# Altium PCB RHS_FEST22-EV_Rev1.PcbDoc
Units mm, origin at the board's own origin, x right, y up, seen from the top; angles counter-clockwise.
Board outline 18 x 75 mm, 4 copper layers (Top Layer, GND, 3.3V/2.8V, Bottom Layer), stack 1.616 mm thick; 48 components, 30 nets, 202 pads, 123 vias.
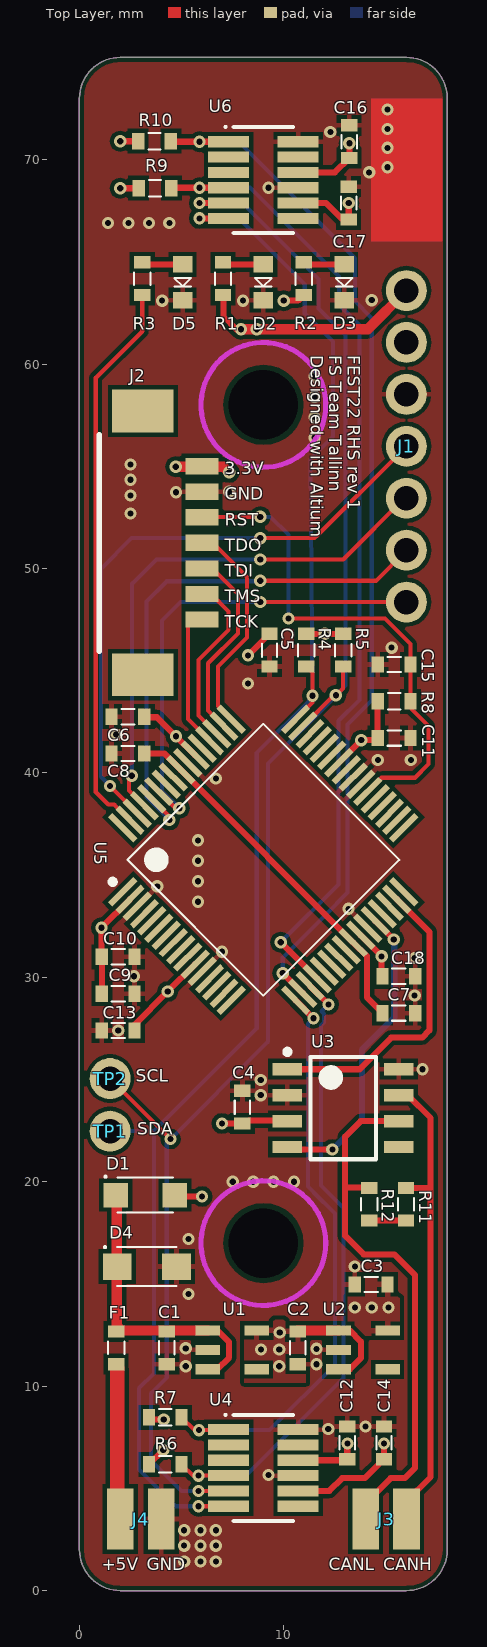
[diagram p0: Top Layer view]
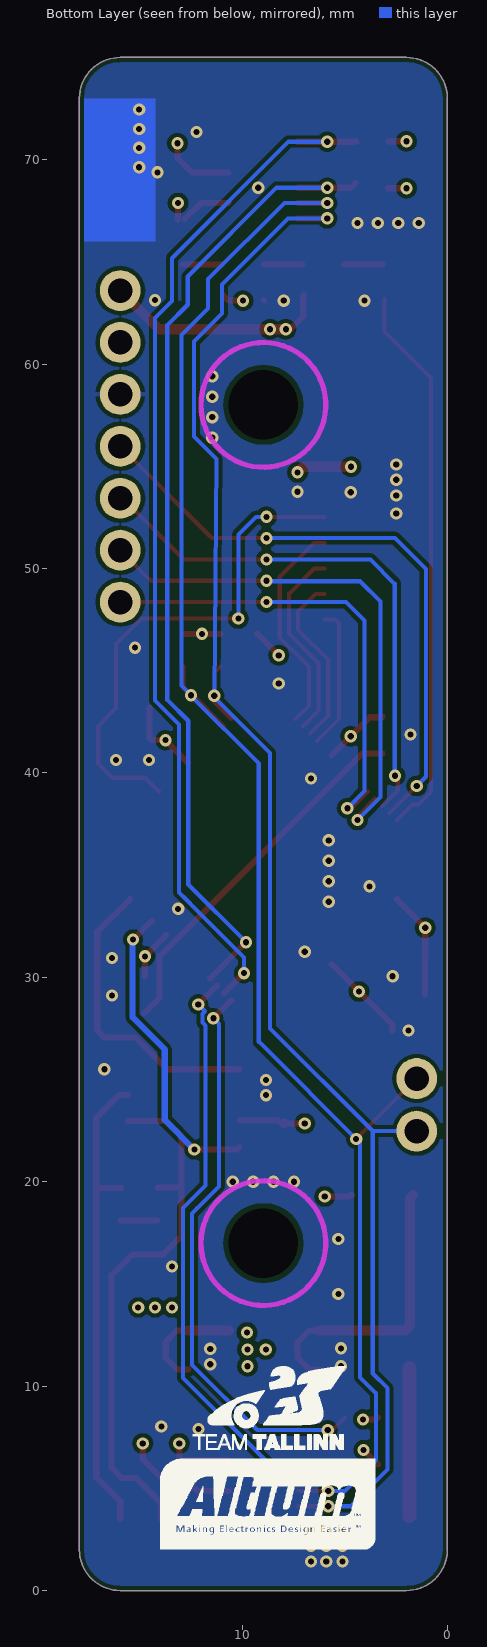
[diagram p1: Bottom Layer view, seen from below]
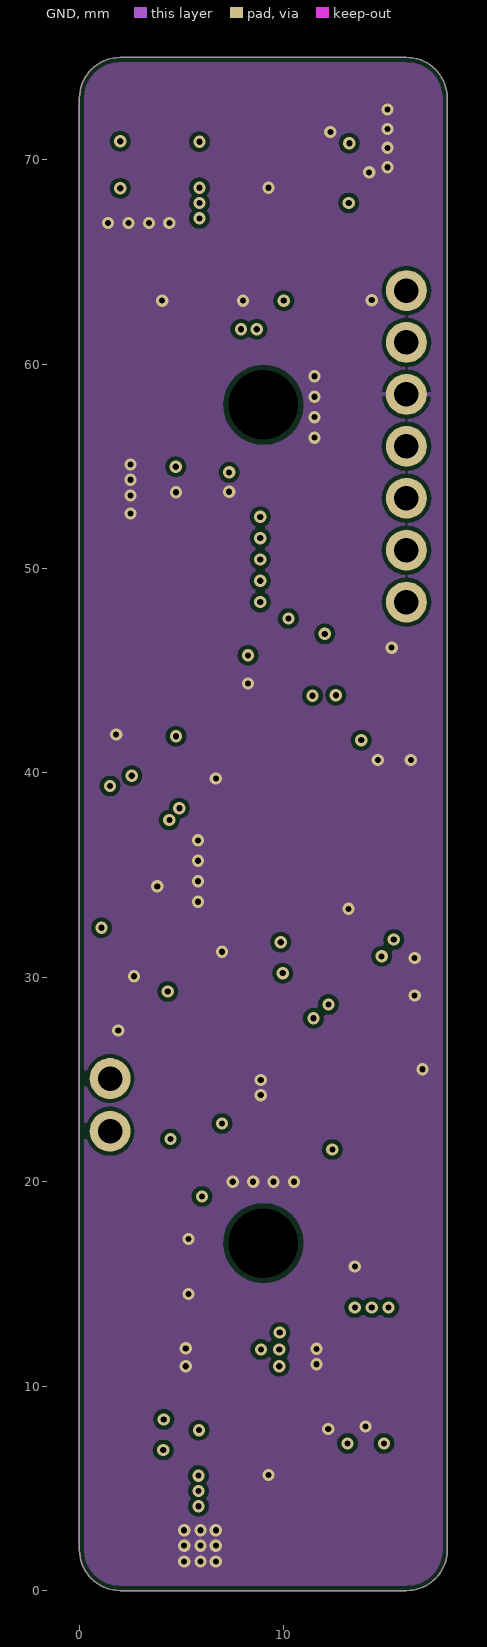
[diagram p2: GND]
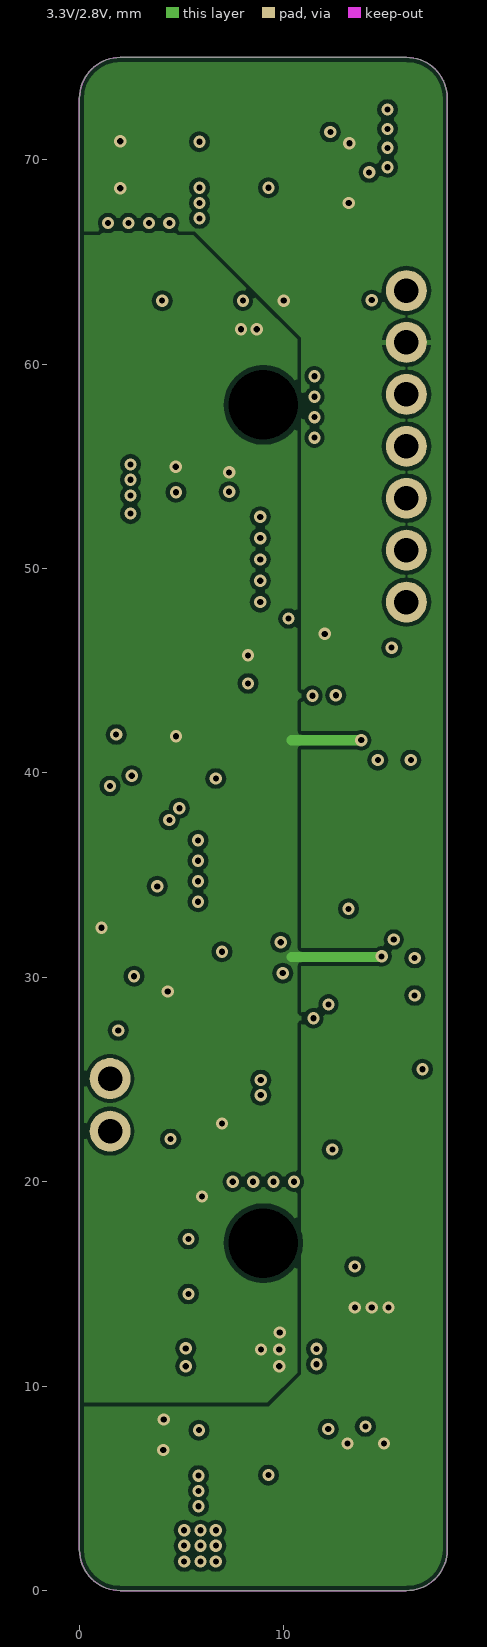
[diagram p3: 3.3V/2.8V]
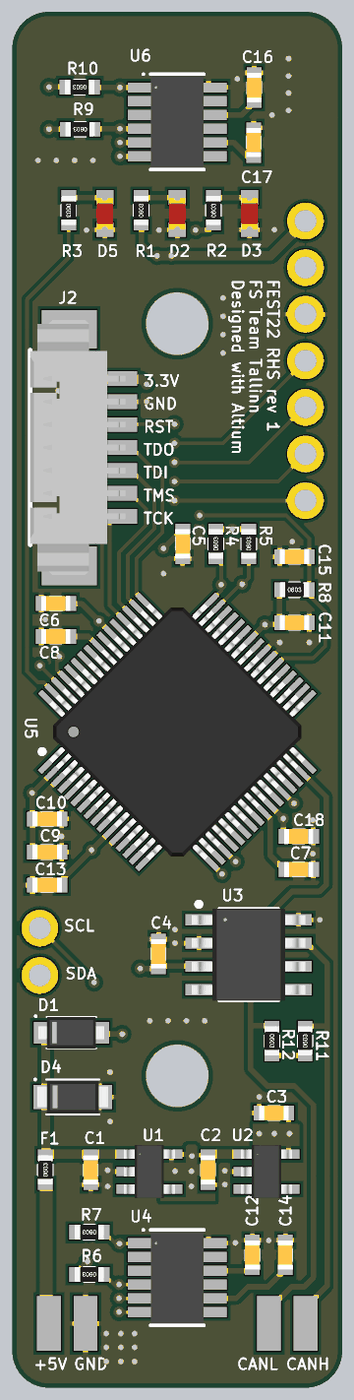
[diagram p4: 3D render of the assembled board from above, using the file's embedded part models]

## Layer stack, top to bottom
Top Solder: solder mask 0.02, Solder Resist, Dk 3.5
Top Layer: signal copper 0.053
Dielectric 1: core 0.18, FR-4, Dk 4.2
GND: signal copper 0.035
Dielectric 3: prepreg 1.08, Dk 4.2
3.3V/2.8V: signal copper 0.035
Dielectric 2: core 0.18, Dk 4.2
Bottom Layer: signal copper 0.053
Bottom Solder: solder mask 0.02, Solder Resist, Dk 3.5

## Board outline
0,2 0,73 cw(c2,73) 2,75 16,75 cw(c16,73) 18,73 18,2 cw(c16,2) 16,0 2,0 cw(c2,2)

## Design rules (kind name [scope] priority, off if disabled: settings)
BoardOutlineClearance [All] p1: gap=0.2 ignorepadtopadclearanceinfootprint=FALSE
Clearance [All] p1: gap=0.2 ignorepadtopadclearanceinfootprint=FALSE except(0.102: Arc-Arc Arc-Track Arc-SMDPad Arc-THPad Arc-Text Track-Track Track-SMDPad Track-THPad Track-Text SMDPad-SMDPad SMDPad-THPad SMDPad-Text THPad-THPad THPad-Text Fill-Text Poly-Text Region-Text Text-Text; 0.127: Arc-Via Track-Via SMDPad-Via THPad-Via Via-Via Via-Text; 0.25: Arc-Hole Track-Hole SMDPad-Hole THPad-Hole Via-Hole Fill-Hole Poly-Hole Region-Hole Text-Hole)
ComponentClearance [All] p1: gap=0.102 collisioncheckmode=3 verticalgap=0.102 showdistances=TRUE
DiffPairsRouting [All] p1: maxlimit=0.102 minlimit=0.102 mostfreqgap=0.102 toplayer_minwidth=0.102 toplayer_maxwidth=1816.048 toplayer_prefwidth=0.102 midlayer1_minwidth=0.102 midlayer1_maxwidth=1816.048 midlayer1_prefwidth=0.102 midlayer2_minwidth=0.102 midlayer2_maxwidth=1816.048 midlayer2_prefwidth=0.102 bottomlayer_minwidth=0.102 bottomlayer_maxwidth=1816.048 bottomlayer_prefwidth=0.102 maxuncoupledlength=12.7
Height [All] p1: minheight=0 maxheight=1816.048 prefheight=12.7
HoleSize [All] p1: absolutevalues=TRUE maxlimit=6.3 minlimit=0.2 maxpercent=80.000 minpercent=20.000
HoleToHoleClearance [All] p1: gap=0.25 allowstackedmicrovias=FALSE
MinimumAnnularRing [All] p1: minimumring=0.076
MinimumSolderMaskSliver [All] p1: minsoldermaskwidth=0
PlaneClearance [All] p1: clearance=0.102
PlaneConnect PlaneConnectPowerPads [InPadClass('PowerPads')] p1: planeconnectstyle=Direct reliefexpansion=0.508 reliefentries=4 reliefconductorwidth=0.254 reliefairgap=0.254
PlaneConnect [All] p2: pad.planeconnectstyle=Relief pad.reliefexpansion=0.3 pad.reliefentries=4 pad.reliefconductorwidth=0.102 pad.reliefairgap=0.102 via.planeconnectstyle=Direct via.reliefexpansion=0.3 via.reliefentries=4 via.reliefconductorwidth=0.127 via.reliefairgap=0.127
PolygonConnect PolygonConnectPowerPads [All vs (InPadClass('PowerPads'))] p1: thpad.connectstyle=Relief thpad.reliefconductorwidth=0.508 thpad.reliefentries=4 thpad.polygonreliefangle="90 Angle" thpad.airgapwidth=0.254 smdpad.connectstyle=Relief smdpad.reliefconductorwidth=0.508 smdpad.reliefentries=4 smdpad.polygonreliefangle="90 Angle" smdpad.airgapwidth=0.254 via.connectstyle=Direct via.reliefconductorwidth=0.254 via.reliefentries=4 via.polygonreliefangle="90 Angle" via.airgapwidth=0.254
PolygonConnect [All] p2: thpad.connectstyle=Relief thpad.reliefconductorwidth=0.254 thpad.reliefentries=4 thpad.polygonreliefangle="90 Angle" thpad.airgapwidth=0.2 smdpad.connectstyle=Relief smdpad.reliefconductorwidth=0.254 smdpad.reliefentries=4 smdpad.polygonreliefangle="90 Angle" smdpad.airgapwidth=0.2 via.connectstyle=Direct via.reliefconductorwidth=0.127 via.reliefentries=4 via.polygonreliefangle="90 Angle" via.airgapwidth=0.127
RoutingVias [All] p1: holewidth=0.3 width=0.6 viastyle="Through Hole" minholewidth=0.2 minwidth=0.45 maxholewidth=6.3 maxwidth=6.55
SilkToSilkClearance [All] p1: silktosilkclearance=0
SilkToSolderMaskClearance [IsPad] p1: minsilkscreentomaskgap=0.102 clearancetoexposedcopper=TRUE
SolderMaskExpansion [All] p1: expansion=0.075
Width [All] p1: maxlimit=1816.048 minlimit=0.102 preferedwidth=0.102
20 further rules are at their usual default settings.

## Classes and differential pairs
component class RHS_FEST22-EV_Power: C1 C2 C3 D1 D2 D3 D4 F1 R1 R2 U1 U2
component class RHS_FEST22-EV_Logic: C4 C5 C6 C7 C8 C9 C10 C11 C12 C13 C14 C15 C16 C17 C18 D5 J1 J2 J3 J4 R3 R4 R5 R6 R7 R8 R9 R10 R11 R12 TP1 TP2 U3 U4 U5 U6

## Components (designator, comment, footprint, x,y, rotation, side; value= is the part's Value field where it differs from the comment)
C1 "1uF" "CAP [0603] 1608" 4.275,11.875 r270 top
C2 "1uF" "CAP [0603] 1608" 10.675,11.875 r270 top
C3 "1uF" "CAP [0603] 1608" 14.275,14.975 r180 top
C4 "0.1uF" "CAP [0603] 1608" 7.975,23.65 r270 top
C5 "10uF" "CAP [0603] 1608" 9.3,46 r270 top
C6 "0.1uF" "CAP [0603] 1608" 2.375,42.75 r0 top
C7 "0.1uF" "CAP [0603] 1608" 15.63,28.25 r180 top
C8 "3.3uF" "CAP [0603] 1608" 2.375,40.95 r180 top
C9 "1uF" "CAP [0603] 1608" 1.9,29.2 r0 top
C10 "0.1uF" "CAP [0603] 1608" 1.9,31 r0 top
C11 "0.1uF" "CAP [0603] 1608" 15.4,41.704 r0 top
C12 "0.1uF" "CAP [0603] 1608" 13.1,7.232 r270 top
C13 "0.1uF" "CAP [0603] 1608" 1.9,27.4 r180 top
C14 "4.7uF" "CAP [0603] 1608" 14.9,7.232 r270 top
C15 "0.1uF" "CAP [0603] 1608" 15.4,45.3 r180 top
C16 "0.1uF" "CAP [0603] 1608" 13.2,70.875 r270 top
C17 "4.7uF" "CAP [0603] 1608" 13.175,67.875 r270 top
C18 "0.1uF" "CAP [0603] 1608" 15.63,30.05 r0 top
D1 "BAT46WH,115" SOD-123F 3.225,19.35 r0 top
D2 "Red LED" "LED [0603] 1608" 9,64 r90 top
D3 "Red LED" "LED [0603] 1608" 12.95,64 r90 top
D4 "TV02W5V0-G" SOD-123-2 3.3,15.85 r0 top
D5 "Red LED" "LED [0603] 1608" 5.05,64 r90 top
F1 "" "RES [0603] 1608" 1.8,11.875 r90 top
J1 "Wire connections_1" "Free pins" 16,63.595 r270 top
J2 "53261-0771" "Molex 53261-0771" 6,55 r270 top
J3 "Wire connections" "Wire pads" 14,3.5 r0 top
J4 "Wire connections" "Wire pads" 2,3.5 r0 top
R1 "750" "RES [0603] 1608" 7.025,64.175 r90 top
R2 "510" "RES [0603] 1608" 10.975,64.175 r90 top
R3 "750" "RES [0603] 1608" 3.075,64.175 r270 top
R4 "2.2k" "RES [0603] 1608" 11.1,46 r90 top
R5 "2.2k" "RES [0603] 1608" 12.9,46 r90 top
R6 "47k" "RES [0603] 1608" 4.2,6.175 r180 top
R7 "47k" "RES [0603] 1608" 4.2,8.475 r180 top
R8 "10k" "RES [0603] 1608" 15.4,43.5 r0 top
R9 "47k" "RES [0603] 1608" 3.7,68.6 r180 top
R10 "47k" "RES [0603] 1608" 3.675,70.9 r180 top
R11 "NF" "RES [0603] 1608" 15.975,18.9 r90 top
R12 "NF" "RES [0603] 1608" 14.175,18.9 r270 top
TP1 "Test Point" "Testpoint round 0.4mm" 1.5,22.475 r90 top
TP2 "Test Point" "Testpoint round 0.4mm" 1.5,25.05 r180 top
U1 "NCV8603SN33T1G" TSOT-5 7.475,11.775 r0 top
U2 "ADP150AUJZ-2.8-R7" TSOT-5 13.875,11.775 r0 top
U3 "SN65HVD231QD" SOIC-8 12.9,23.6 r0 top
U4 "VL6180V1NR/1" VL6180 9,6 r0 top locked
U5 "TM4C123 64-pin" LQFP64 9,35.75 r45 top
U6 "VL6180V1NR/1" VL6180 9,69 r0 top

## Footprints (in the part's own frame and the unit in brackets; to place one, negate y for a bottom-side part, rotate by r counter-clockwise, add the part's x,y. Pads: shape width x height; smd on the part's side, far side on the other; paste and mask are expansions set on the pad)
"CAP [0603] 1608" [mm]
  rect 0.6x0.8 smd: 1(-0.8,0) 2(0.8,0)
  silkscreen extent -0.33,-0.38 0.33,0.38, body extent -0.93,-0.41 0.93,0.41, height 0.81
"Free pins" [mm]
  round 2 hole 1.2: 1(0,0) 2(2.54,0) 3(5.08,0) 4(7.62,0) 5(10.16,0) 6(12.7,0) 7(15.24,0)
"LED [0603] 1608" [mm] "Chip Diode, 2-Leads, Body 1.60x0.80mm, IPC Medium Density"
  rect 0.8x0.95 smd: 1(-0.875,0) 2(0.875,0)
  silkscreen extent -0.2,-0.4 0.2,0.4, body extent -0.85,-0.45 0.85,0.45, height 0.9
LQFP64 [mm]
  rect 1.75x0.3 smd: 1(-5.975,3.75) 2(-5.975,3.25) 3(-5.975,2.75) 4(-5.975,2.25) 5(-5.975,1.75) 6(-5.975,1.25) 7(-5.975,0.75) 8(-5.975,0.25) 9(-5.975,-0.25) 10(-5.975,-0.75) 11(-5.975,-1.25) 12(-5.975,-1.75) 13(-5.975,-2.25) 14(-5.975,-2.75) 15(-5.975,-3.25) 16(-5.975,-3.75) 33(5.975,-3.75) 34(5.975,-3.25) 35(5.975,-2.75) 36(5.975,-2.25) 37(5.975,-1.75) 38(5.975,-1.25) 39(5.975,-0.75) 40(5.975,-0.25) 41(5.975,0.25) 42(5.975,0.75) 43(5.975,1.25) 44(5.975,1.75) 45(5.975,2.25) 46(5.975,2.75) 47(5.975,3.25) 48(5.975,3.75)
  rect 0.3x1.75 smd: 17(-3.75,-5.975) 18(-3.25,-5.975) 19(-2.75,-5.975) 20(-2.25,-5.975) 21(-1.75,-5.975) 22(-1.25,-5.975) 23(-0.75,-5.975) 24(-0.25,-5.975) 25(0.25,-5.975) 26(0.75,-5.975) 27(1.25,-5.975) 28(1.75,-5.975) 29(2.25,-5.975) 30(2.75,-5.975) 31(3.25,-5.975) 32(3.75,-5.975) 49(3.75,5.975) 50(3.25,5.975) 51(2.75,5.975) 52(2.25,5.975) 53(1.75,5.975) 54(1.25,5.975) 55(0.75,5.975) 56(0.25,5.975) 57(-0.25,5.975) 58(-0.75,5.975) 59(-1.25,5.975) 60(-1.75,5.975) 61(-2.25,5.975) 62(-2.75,5.975) 63(-3.25,5.975) 64(-3.75,5.975)
  silkscreen extent -6.1,-4.7 4.7,4.7, body extent -6,-6 6,6, height 1.5
"Molex 53261-0771" [mm]
  rect 0.8x1.6 smd: 1(0,0) 2(1.25,0) 3(2.5,0) 4(3.75,0) 5(5,0) 6(6.25,0) 7(7.5,0)
  rect 2.1x3 smd: 8(10.2,-2.9) 9(-2.7,-2.9)
  silkscreen extent -1.55,-5.02 9.05,-5.02, body extent -3.2,-5.03 10.7,0.17, height 3.4
"RES [0603] 1608" [mm]
  rect 0.6x0.8 smd: 1(-0.8,0) 2(0.8,0)
  silkscreen extent -0.3,-0.4 0.3,0.4, body extent -0.8,-0.4 0.8,0.4, height 0.46
SOD-123-2 [mm]
  rect 1.4x1.3 smd: 1(-1.45,0) 2(1.45,0)
  silkscreen extent -2.1,-0.95 1.45,1, body extent -1.93,-0.95 1.93,0.95, height 1.35
SOD-123F [mm] "SODFL, 2-Leads, Body 1,60x3,50mm, IPC Medium Density"
  rect 1.2x1.2 smd: 1(-1.45,0) 2(1.45,0)
  silkscreen extent -2,-0.85 1.35,0.95, body extent -1.8,-0.85 1.8,0.85, height 1.2
SOIC-8 [mm] "SOIC, 8-Leads, Body 4,91x3,90mm, Pitch 1,27mm, IPC Medium Density"
  rect 1.45x0.6 smd: 1(-2.725,1.905) 2(-2.725,0.635) 3(-2.725,-0.635) 4(-2.725,-1.905) 5(2.725,-1.905) 6(2.725,-0.635) 7(2.725,0.635) 8(2.725,1.905)
  silkscreen extent -2.85,-2.5 1.6,2.88, body extent -3.1,-2.5 3.1,2.5, height 1.76
"Testpoint round 0.4mm" [mm]
  round 2 hole 1.2: 1(0,0)
TSOT-5 [mm] "SOT23, 5-Leads, Body 3,05x3,00mm, Pitch 0,95mm, IPC Medium Density"
  rect 1.2x0.5 smd: 1(-1.2,0.95) 2(-1.2,0) 3(-1.2,-0.95) 4(1.2,-0.95) 5(1.2,0.95)
  body extent -1.4,-1.45 1.4,1.45, height 0.99
VL6180 [mm] "PSON, 12-Leads, Body 4,80x2,80mm, Pitch 0,75mm, IPC Medium Density"
  rect 2x0.55 smd: 1(-1.7,1.875) 2(-1.7,1.125) 3(-1.7,0.375) 4(-1.7,-0.375) 5(-1.7,-1.125) 6(-1.7,-1.875) 7(1.7,-1.875) 8(1.7,-1.125) 9(1.7,-0.375) 10(1.7,0.375) 11(1.7,1.125) 12(1.7,1.875)
  silkscreen extent -1.9,-2.6 1.45,2.65, body extent -1.45,-2.45 1.45,2.45, height 1.09
"Wire pads" [mm]
  rect 1.3x3 smd: 1(0,0) 2(2,0)

## Part data
C1 C2 C3 C9: library part "Cap 1uF", Manufacturer=MURATA, Datasheet=https://www.farnell.com/datasheets/3158835.pdf, Order Step=10, Price=0.156, Product Name=GCJ188R71E105KA01D, Supplier=Farnell, Supplier Number=2781410
C4 C6 C7 C10 C11 C12 C13 C15 C16 C18: library part "Cap 0.1uF", Manufacturer=MURATA, Datasheet=https://4donline.ihs.com/images/VipMasterIC/IC/MURE/MURE-S-A0010851662/MURE-S-A0010851692-1.pdf?hkey=6D3A4C79FDBF58556ACFDE234799DDF0, Order Step=10, Price=0.134, Product Name=GCM188L81H104KA57D, Supplier=Farnell, Supplier Number=2781423
C5: library part "Cap 10uF", Manufacturer=MURATA, Datasheet=https://4donline.ihs.com/images/VipMasterIC/IC/MURE/MURE-S-A0010871772/MURE-S-A0010871249-1.pdf?hkey=6D3A4C79FDBF58556ACFDE234799DDF0, Order Step=10, Price=0.384, Product Name=GRM188R61A106MAALD, Supplier=Farnell, Supplier Number=3581376
C8: library part "Cap 3.3uF", Manufacturer=TDK, Datasheet=https://www.farnell.com/datasheets/1807242.pdf, Order Step=10, Price=0.16, Product Name=CGA3E1X5R1A335K080AC, Supplier=Farnell, Supplier Number=2210840
C14 C17: library part "Cap 4.7uF", Manufacturer=MURATA, Order Step=10, Price=0.45, Product Name=GRT188R61C475KE13D, Supplier=Farnell, Supplier Number=3581438
D1: "Schottky diode", Manufacturer=Nexperia, Datasheet=https://www.farnell.com/datasheets/1508345.pdf, Order Step=1, Price=0.298, Product Name=BAT46WH,115, Supplier=Mouser, Supplier Number=771-BAT46WH115
D2 D3 D5: Manufacturer=KINGBRIGHT, Datasheet=http://www.farnell.com/datasheets/2068420.pdf?_ga=2.36173545.89986474.1576161266-1510626616.1539531469, Order Step=5, Price=0,419, Product Name=KPT-1608LVSECK-J3-PRV, Supplier=Farnell, Supplier Number=2610406
D4: "TVS diode", Manufacturer=Comchip, Datasheet=https://www.mouser.ee/datasheet/2/80/TV02W_G_series_RevE-2506525.pdf, Order Step=1, Price=0,368, Product Name=TV02W5V0-G, Supplier=Mouser, Supplier Number=750-TV02W5V0-G
F1: library part Fuse, Manufacturer=Littlefuse, Datasheet=https://www.farnell.com/datasheets/2282563.pdf, Order Step=10, Price=0.664, Product Name=0467.250NR, Supplier=Farnell, Supplier Number=1596942
J1: "Extra through holes"
J2: "Connector", Manufacturer=Molex, Datasheet=https://www.mouser.ee/ProductDetail/Molex/53261-0771?qs=%2Fha2pyFadugsCwNxBg3%2FRHDCLTseGEMg8wdDzDUpq7U%3D, Order Step=1, Price=0.669, Product Name=53261-0771, Supplier=Mouser, Supplier Number=538-53261-0771
R1 R3: library part "RES 750", Manufacturer=YAGEO, Datasheet=https://www.farnell.com/datasheets/3046031.pdf, Order Step=10, Price=0.0289, Product Name=RC0603FR-07750RL, Supplier=Farnell, Supplier Number=3495907
R2: library part "Res 510", Manufacturer=YAGEO, Datasheet=https://www.farnell.com/datasheets/3046031.pdf, Order Step=10, Price=0.0266, Product Name=RC0603FR-07510RL, Supplier=Farnell, Supplier Number=3495869
R4 R5: library part "Res 2.2k", Manufacturer=YAGEO, Datasheet=https://www.farnell.com/datasheets/3046027.pdf, Order Step=10, Price=0.0369, Product Name=AC0603FR-072K2L, Supplier=Farnell, Supplier Number=3495253
R6 R7 R9 R10: library part "Res 47k", Manufacturer=YAGEO, Datasheet=https://www.farnell.com/datasheets/3046027.pdf, Order Step=10, Price=0.038, Product Name=AC0603FR-0747KL, Supplier=Farnell, Supplier Number=3495270
R8: library part "Res 10k", Manufacturer=Yageo, Datasheet=https://www.farnell.com/datasheets/3577113.pdf, Order Step=10, Price=0.0413, Product Name=AC0603FR-0710KL, Supplier=Farnell, Supplier Number=3495224
R11 R12: library part Resistor
U1: "Linear voltage regulator", Manufacturer=onsemi, Datasheet=https://www.mouser.ee/datasheet/2/308/1/NCV8603_D-2317642.pdf, Order Step=1, Price=0.613, Product Name=NCV8603SN33T1G, Supplier=Mouser, Supplier Number=863-NCV8603SN33T1G
U2: "Linear voltage regulator", Manufacturer="Analog Devices", Datasheet=https://www.mouser.ee/datasheet/2/609/ADP150-1503284.pdf, Order Step=1, Price=0.97, Product Name=ADP150AUJZ-2.8-R7, Supplier=Mouser, Supplier Number=584-ADP150AUJZ-2.8R7
U3: "CAN tranciever", Manufacturer="Texas Instruments", Datasheet=https://www.ti.com/lit/ds/symlink/sn65hvd231q-q1.pdf?HQS=dis-mous-null-mousermode-dsf-pf-null-wwe&ts=1637169427896&ref_url=https%253A%252F%252Fwww.mouser.ee%252F, Order Step=1, Price=3,93, Product Name=SN65HVD231QD, Supplier=Digi-key, Supplier Number=296-12704-5-ND
U4 U6: "Time-of-Flight proximity sensor, 2.6V, 3V, Optical, RoHS", Manufacturer=STMicroelectronics, Datasheet=https://www.mouser.ee/datasheet/2/389/dm00089971-1862074.pdf, Order Step=1, Price=3.53, Product Name=VL6180V1NR/1, Supplier=Mouser, Supplier Number=511-VL6180V1NR/1
U5: "MCU 32-Bit Tiva C ARM Cortex M4F RISC 256KB Flash 1.2V/3.3V 64-Pin LQFP Tray/Tube", Manufacturer="Texas Instruments", Datasheet=https://www.ti.com/general/docs/suppproductinfo.tsp?distId=10&gotoUrl=https%3A%2F%2Fwww.ti.com%2Flit%2Fgpn%2Ftm4c1230h6pm, Order Step=1, Price (1st level)=7.45, Product Name=TM4C1230H6PMIR, Supplier=Digi-Key, Supplier Number=?296-43613-1-ND?

## Free pads (board coordinates)
  round 0 hole 3.4: 18(9,17) 19(9,58)

## Via types
v1: diameter 0.6, hole 0.3, Top Layer to Bottom Layer, tented both sides, 123 vias

## Nets (pads, with @x,y where several pads share a name; then routed paths per layer and width w, separated by ;. In a path a pad name is that pad's centre, name@x,y a point inside that pad or via, vN(x,y) a via of type N, cw(c..) or ccw(c..) an arc to the next point about the centre after c; other vN are vias at no path point)
+2.8V: C3.1 C12.2 C14.2 C16.2 C17.2 J1.2 R2.1 R4.2 R5.2 R6.2 R7.2 R9.2 R10.2 U2.5 U4.8 U4.10 U6.8 U6.10 | length 22.1
  Top Layer w0.3: v1(2,68.6) R9.2 ; v1(2,70.9) R10.2 ; R6.2 v1(4.101,6.876) ; R7.2 3.5,8.375 v1(4.127,8.375) ; v1(10,63.1) 10.7,63.1 R2.1 ; U4.8 12.224,4.875 12.849,5.5 13.968,5.5 C14.2 v1(14.9,7.2) ; U6.8 12.064,67.875 C17.2@12.864,67.075 ; U6.10 12.5,69.375 C16.2 13.205,70.08 v1(13.205,70.8) ; U4.10@10.75,6.325 U4.10 13.043,6.375 C12.2 13.1,7.182 v1(13.118,7.2) ; R4.2 v1(12,46.8) R5.2 ; C17.2 v1(13.175,67.875) ; C17.2@13.2,67.112 C17.2@13.206,67.106
  other v1: 13.475,13.85 14.3,13.85 15.125,13.85
+3.3V: C2.1 C4.2 C5.1 C6.2 C9.1 C10.1 C11.1 C13.1 C18.1 D1.2 J1.1 J2.1 R1.1 R8.1 U1.5 U2.1 U2.3 U3.3 U5.2 U5.11 U5.26 U5.42 U5.54 | length 52.1
  Top Layer w0.3: C9.1@1.1,29.175 C9.1 1.1,30.95 1.075,30.975 1.079,30.979 v1(1.079,32.425) U5.2 ; C13.1@2.675,27.375 2.675,27.657 v1(4.325,29.307) U5.11 ; C6.2 3.2,42.725 3.793,42.725 v1(4.725,41.793) U5.54 ; D1.2 4.7,19.375 4.8,19.275 v1(6,19.275) ; v1(6.975,22.85) C4.2 ; R1.1 7.05,63.35 7.05,62.325 7.675,61.7 v1(7.9,61.7) ; v1(8.25,45.75) C5.1 ; C4.2@8.29,22.99 U3.3@10.175,22.99 ; U2.3 13.225,10.825 13.775,11.375 13.775,12.175 13.225,12.725 U2.1 ; U5.42 v1(13.789,41.6) 14.471,41.6 14.575,41.704 R8.1@14.575,43.204 ; U5.26 v1(14.786,31.025) 14.786,30.064 C18.1@14.8,30.05
  Top Layer w0.5: v1(4.712,54.975) 7.05,54.975 v1(7.325,54.7) ; v1(7.9,61.7) v1(8.675,61.7) 14.105,61.7 J1.1 ; C2.1@10.675,12.725 U2.1
  3.3V/2.8V w0.3: v1@14.761,31 v1(14.786,31.025)
  3.3V/2.8V w0.5: 10.371,31 v1@14.761,31 ; 10.371,41.6 v1(13.789,41.6)
  other v1: 9.775,10.975 8.88,11.8 9.775,11.8 9.8,12.625
+5V: F1.1 J4.1 | length 7.4
  Top Layer w0.3: J4.1@1.85,3.65 J4.1
  Top Layer w0.7: J4.1@1.85,3.65 F1.1@1.85,10.875
CANH: J3.2 R11.2 U3.7 | length 23.3
  Top Layer w0.3: U3.7 16.065,24.235 17.175,23.125 17.175,19.725 ; R11.2 17.15,19.7 17.175,19.725 ; J3.2 16,4.375 17.175,5.55 17.175,19.725
CANL: J3.1 R12.1 U3.6 | length 26.5
  Top Layer w0.3: J3.1 14,4.275 15.225,5.5 15.925,5.5 16.425,6 16.425,15.425 15.4,16.45 13.9,16.45 13,17.35 13,19.725 ; R12.1 14.15,19.725 13,19.725 ; U3.6 13.765,22.965 13,22.2 13,19.725
CANRx: U3.4 U5.28 | length 15.1
  Top Layer w0.3: U3.4 10.295,21.575 v1(12.375,21.575) ; U5.28 v1(15.375,31.85)
  Bottom Layer w0.3: v1(12.375,21.575) 13.825,23.025 13.825,26.475 15.4,28.05 15.4,31.825 v1(15.375,31.85)
CANTx: U3.1 U5.31 | length 14.8
  Top Layer w0.3: U3.1 13.705,25.505 15.25,27.05 16.775,27.05 17.125,27.4 17.125,32.221 U5.31
Enable1: R6.1 U4.4 U5.19 | length 31.9
  Top Layer w0.2: R6.1 5.55,5.625 v1(5.825,5.625) U4.4
  Top Layer w0.3: U5.19 v1(12.186,28.675)
  Bottom Layer w0.2: v1(5.825,5.625) 8.15,5.625 12.925,10.4 12.925,18.725 11.825,19.825 11.825,27.633 11.974,27.782 11.974,28.218 11.851,28.341 v1(12.186,28.675)
Enable2: R9.1 U5.20 U6.4 | length 48.6
  Top Layer w0.3: R9.1@4.5,68.85 4.725,68.625 v1(5.875,68.625) U6.4 ; v1(9.85,31.718) U5.20
  Bottom Layer w0.2: v1(5.875,68.625) 8.35,68.625 12.7,64.275 12.7,62.9 13.7,61.9 13.7,43.575 12.675,42.55 12.675,34.543 v1(9.85,31.718)
GND: C1.2 C2.2 C3.2 C4.1 C5.2 C6.1 C7.1 C8.2 C9.2 C10.2 C11.2 C12.1 C13.2 C14.1 C15.2 C16.1 C17.1 C18.2 D2.1 D3.1 D4.2 D5.1 J1.3 J2.2 J4.2 U1.2 U2.2 U3.2 U3.8 U4.9 U4.12 U5.3 U5.12 U5.27 U5.39 U5.40 U5.55 U6.9 U6.12 | length 0
  Top Layer w0.3: D2.1@8.975,63.1 D2.1
  other v1: 5.125,1.425 5.925,1.425 6.675,1.425 5.125,2.2 5.925,2.2 6.675,2.2 5.125,2.95 5.925,2.95 6.675,2.95 9.25,5.65 12.175,7.9 13.991,8.025 5.2,10.975 11.6,11.075 11.6,11.825 5.2,11.85 5.334,14.511 13.475,15.85 5.334,17.2 7.5,20 8.5,20 9.5,20 10.5,20 8.875,24.235 8.875,24.975 16.78,25.505 1.9,27.4 16.4,29.112 2.675,30.05 16.4,30.942 6.975,31.25 13.168,33.35 5.805,33.7 3.811,34.45 5.805,34.7 5.805,35.7 5.805,36.7 6.675,39.725 14.6,40.625 16.213,40.625 1.8,41.875 8.25,44.375 15.275,46.125 2.5,52.683 2.5,53.565 4.725,53.725 7.325,53.75 2.5,54.34 2.5,55.09 11.5,56.4 11.5,57.4 11.5,58.4 11.5,59.4 4.05,63.1 8,63.1 14.3,63.125 1.4,66.9 2.4,66.9 3.4,66.9 4.4,66.9 9.25,68.625 14.175,69.375 15.075,69.625 15.075,70.575 12.275,71.35 15.075,71.5 15.075,72.45
INT1: R7.1 U4.1 U5.17 | length 29.4
  Top Layer w0.2: R7.1 5.625,7.85 v1(5.85,7.85) 7.275,7.85 U4.1
  Top Layer w0.3: U5.17 v1(11.447,28)
  Bottom Layer w0.2: v1(5.85,7.85) 9.3,7.85 12.495,11.045 12.495,18.448 12.233,18.71 11.709,19.234 11.175,19.768 11.175,27.728 v1(11.447,28)
INT2: R10.1 U5.18 U6.1 | length 51.3
  Top Layer w0.3: R10.1 4.45,70.875 v1(5.875,70.875) U6.1 ; v1(9.95,30.204) U5.18
  Bottom Layer w0.2: v1(5.875,70.875) 7.775,70.875 13.475,65.175 13.475,63.075 14.3,62.25 14.3,43.539 13.125,42.364 13.125,34.15 12.925,33.95 12.919,33.95 12.568,33.599 12.568,33.587 9.95,30.969 v1(9.95,30.204)
LED: R3.2 U5.63 | length 27.3
  Top Layer w0.2: U5.63 1.704,38.45 1.413,38.45 0.8,39.063 0.8,59.327 3.075,61.602 R3.2@3.075,63.2
NetC1_1: C1.1 D1.1 D4.1 F1.2 U1.1 U1.3 | length 14.3
  Top Layer w0.3: U1.3 6.75,10.825 7.325,11.4 7.325,12.15 6.75,12.725 U1.1
  Top Layer w0.5: D1.1@1.675,19.35 1.825,19.2 1.825,12.95 2.05,12.725 U1.1
NetD2_2: D2.2 R1.2 | length 1.9
  Top Layer w0.3: R1.2@7.1,64.875 D2.2
NetD3_2: D3.2 R2.2 | length 1.9
  Top Layer w0.3: R2.2@11.05,64.875 D3.2
NetD5_2: D5.2 R3.1 | length 1.9
  Top Layer w0.3: R3.1@3.15,64.875 D5.2
NetR11_1: R11.1 R12.2 | length 1.8
  Top Layer w0.3: R12.2 R11.1
PD0: J1.5 U5.61 | length 26.4
  Top Layer w0.2: v1(2.563,39.863) 2.425,39.725 2.425,39.143 U5.61 ; v1(8.85,50.44) 12.905,50.44 12.94,50.475 J1.5@16,53.535
  Bottom Layer w0.2: v1(2.563,39.863) 2.575,39.875 2.575,49.25 3.765,50.44 3.835,50.44 v1(8.85,50.44)
PD1: J1.4 U5.62 | length 30.1
  Top Layer w0.2: v1(1.5,39.361) U5.62 ; v1(8.85,51.483) 11.508,51.483 11.625,51.6 J1.4
  Bottom Layer w0.2: v1(1.5,39.361) 1.05,39.811 1.05,49.975 2.558,51.483 2.793,51.483 v1(8.85,51.483)
PE4: J1.7 U5.59 | length 23.2
  Top Layer w0.2: U5.59 4.712,38.27 v1(4.891,38.27) ; v1@8.88,48.355 J1.7
  Bottom Layer w0.2: v1(4.891,38.27) 4.05,39.111 4.05,47.455 4.95,48.355 v1@8.88,48.355
  other v1: 8.85,48.355
PE5: J1.6 U5.60 | length 26.3
  Top Layer w0.2: U5.60 4.4,37.875 v1(4.4,37.7) ; v1(8.85,49.398) 14.503,49.398 J1.6
  Bottom Layer w0.2: v1(4.4,37.7) 3.275,38.825 3.275,48.375 4.275,49.375 8.827,49.375 v1(8.85,49.398)
RST: C15.1 J2.3 R8.2 U5.38 | length 24.9
  Top Layer w0.2: J2.3 6.025,52.525 v1(8.85,52.525) ; v1(10.225,47.55) 14.954,47.55 16.2,46.304 C15.1 R8.2 16.2,43.178 17.075,42.303 17.075,40.425 16.412,39.762 14.78,39.762 U5.38
  Bottom Layer w0.2: v1(8.85,52.525) 9.35,52.525 10.225,51.65 v1(10.225,47.55)
SCL: R5.1 TP2.1 U4.5 U5.47 U6.5 | length 83.5
  Top Layer w0.2: TP2.1 v1(4.461,22.089) ; v1(5.825,4.875) U4.5 ; U5.47 12.454,43.8 v1(12.545,43.8) 12.575,43.8 12.9,44.125 R5.1
  Top Layer w0.3: v1(5.875,67.875) U6.5
  Bottom Layer w0.2: v1(5.825,4.875) 5,4.875 3.5,6.375 3.5,9.653 4.275,10.428 4.275,21.9 9.225,26.85 9.225,40.45 12.545,43.77 v1(12.545,43.8) 13.01,44.265 13.01,61.415 11.7,62.725 11.7,64.15 7.975,67.875 v1(5.875,67.875)
SDA: R4.1 TP1.1 U4.6 U5.48 U6.6 | length 80.7
  Top Layer w0.2: v1(5.825,4.125) U4.6 ; U5.48 11.4,43.453 v1(11.4,43.775) 11.4,44.9 R4.1
  Top Layer w0.3: v1(5.875,67.125) U6.6
  Bottom Layer w0.2: TP1.1 3.65,22.475 ; v1(5.825,4.125) 4.725,4.125 2.925,5.925 2.925,9.9 3.65,10.625 3.65,22.475 ; v1(5.875,67.125) 7.8,67.125 11.025,63.9 11.025,62.475 12.4,61.1 12.4,56.457 11.3,55.357 v1(11.4,43.775) 11.35,43.65 8.675,40.975 8.675,27.5 3.65,22.475
TCK: J2.7 U5.52 | length 7
  Top Layer w0.2: J2.7 5.5,47.5 5.305,47.305 5.305,42.627 U5.52
TDI: J2.5 U5.50 | length 9.7
  Top Layer w0.2: J2.5 6.511,50 7.75,48.761 7.75,46.814 6.3,45.364 6.3,43.046 U5.50
TDO: J2.4 U5.49 | length 10.7
  Top Layer w0.2: J2.4 6.525,51.25 8.2,49.575 8.2,46.627 6.775,45.202 6.775,43.278 U5.49
TMS: J2.6 U5.51 | length 8.6
  Top Layer w0.2: J2.6 6.45,48.75 7.3,47.9 7.3,47 5.825,45.525 5.825,42.814 U5.51
VDDC: C7.2 C8.1 U5.25 U5.56 | length 18.1
  Top Layer w0.3: C8.1 4.154,40.95 U5.56 U5.25 14.075,31.029 14.075,29.005 C7.2
pads on no net: J2.8 J2.9 U1.4 U2.4 U3.5 U4.2 U4.3 U4.7 U4.11 U5.1 U5.4 U5.5 U5.6 U5.7 U5.8 U5.9 U5.10 U5.13 U5.14 U5.15 U5.16 U5.21 U5.22 U5.23 U5.24 U5.29 U5.30 U5.32 U5.33 U5.34 U5.35 U5.36 U5.37 U5.41 U5.43 U5.44 U5.45 U5.46 U5.53 U5.57 U5.58 U5.64 U6.2 U6.3 U6.7 U6.11

## Polygon pours and split planes (outlines as drawn)
+3.3V on 3.3V/2.8V "Power layer 3.3V" (solid, pour order 58): 0,66.5 5.649,66.5 10.859,61.29 10.859,10.585 9.274,9 0,9
+2.8V on 3.3V/2.8V "Power layer 2.8V" (solid, pour order 54): 6.975,65.174 5.649,66.5 0,66.5 0,73 cw(c2,73) 2,75 16,75 cw(c16,73) 18,73 18,2 cw(c16,2) 16,0 2,0 cw(c2,2) 0,2 0,9 9.274,9 10.859,10.585 10.859,61.29
GND on Top Layer "Top Layer-GND" (solid, remove dead copper, pour order 60): 0,2 0,73 cw(c2,73) 2,75 16,75 cw(c16,73) 18,73 18,2 cw(c16,2) 16,0 2,0 cw(c2,2)
+2.8V on Top Layer "Bottom layer 2.8V" (solid, pour order 34): 15.675,12.475 15.675,15.372 13.125,15.372 13.125,12.475
+3.3V on Top Layer "Top layer 3.3V" (solid, pour order 30): 8.075,13.25 8.075,10.175 11.075,10.175 11.075,13.25
GND on GND "Ground layer GND" (solid, pour order 50): 2,0 cw(c2,2) 0,2 0,73 cw(c2,73) 2,75 16,75 cw(c16,73) 18,73 18,2 cw(c16,2) 16,0
GND on Bottom Layer "Bottom Layer-GND" (solid, remove dead copper, pour order 62): 0,2 0,73 cw(c2,73) 2,75 16,75 cw(c16,73) 18,73 18,2 cw(c16,2) 16,0 2,0 cw(c2,2)

## Keep-outs
Top Layer:
  circle w0.254: c9,58 r3.052
  circle w0.254: c9,17 r3.052
Bottom Layer:
  circle w0.254: c9,58 r3.052
  circle w0.254: c9,17 r3.052
Keep-Out Layer:
  the board outline again, w0.05

## Other copper
Top Layer:
  rectangle net GND: 14.271,66 17.771,73
Bottom Layer:
  rectangle net GND: 14.271,66 17.771,73

## Silkscreen, mask and mechanical layers (free items; w line width, h text height)
Top Overlay:
  text "FEST22 RHS rev 1 / FS Team Tallinn / Designed with Altium" at 11.325,60.425 h0.6 r270
  text "3.3V" at 7.1,54.6 h0.6
  text "GND" at 7.1,53.35 h0.6
  text "RST" at 7.1,52.1 h0.6
  text "TDO" at 7.1,50.85 h0.6
  text "TDI" at 7.1,49.6 h0.6
  text "TMS" at 7.1,48.35 h0.6
  text "TCK" at 7.1,47.1 h0.6
  text "SCL" at 2.75,24.9 h0.6
  text "SDA" at 2.83,22.3 h0.6
  text "+5V" at 1.1,1 h0.6
  text "GND" at 3.3,1 h0.6
  text "CANL" at 12.2,1 h0.6
  text "CANH" at 14.876,1 h0.6
Bottom Overlay:
  drawing of 2078 lines, arcs and shapes, not listed